# EAGLE board Panelized_Proto_cutouts_outline (EAGLE 9.1.1), part 1 of 2
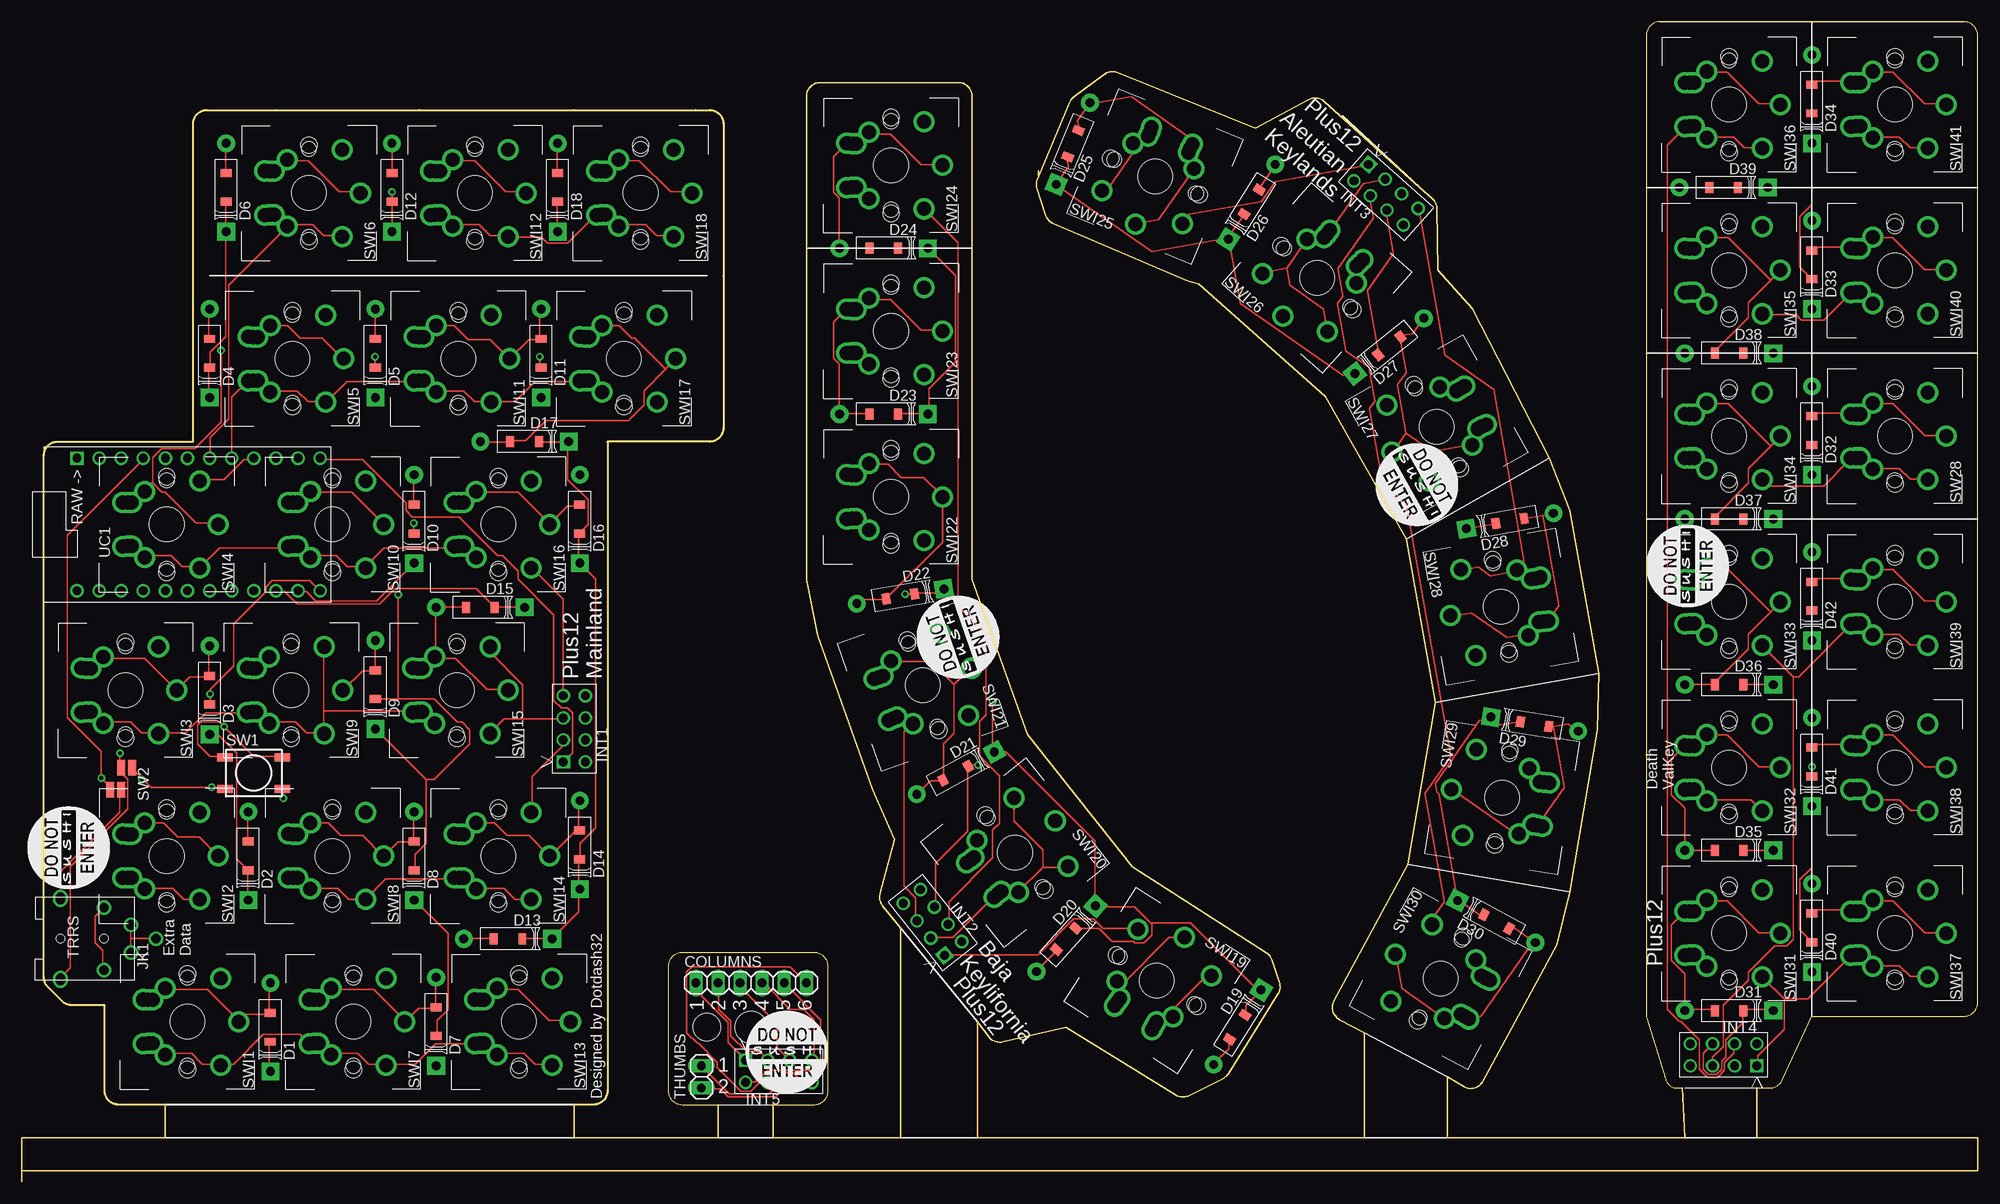
[diagram p0: board, top side]
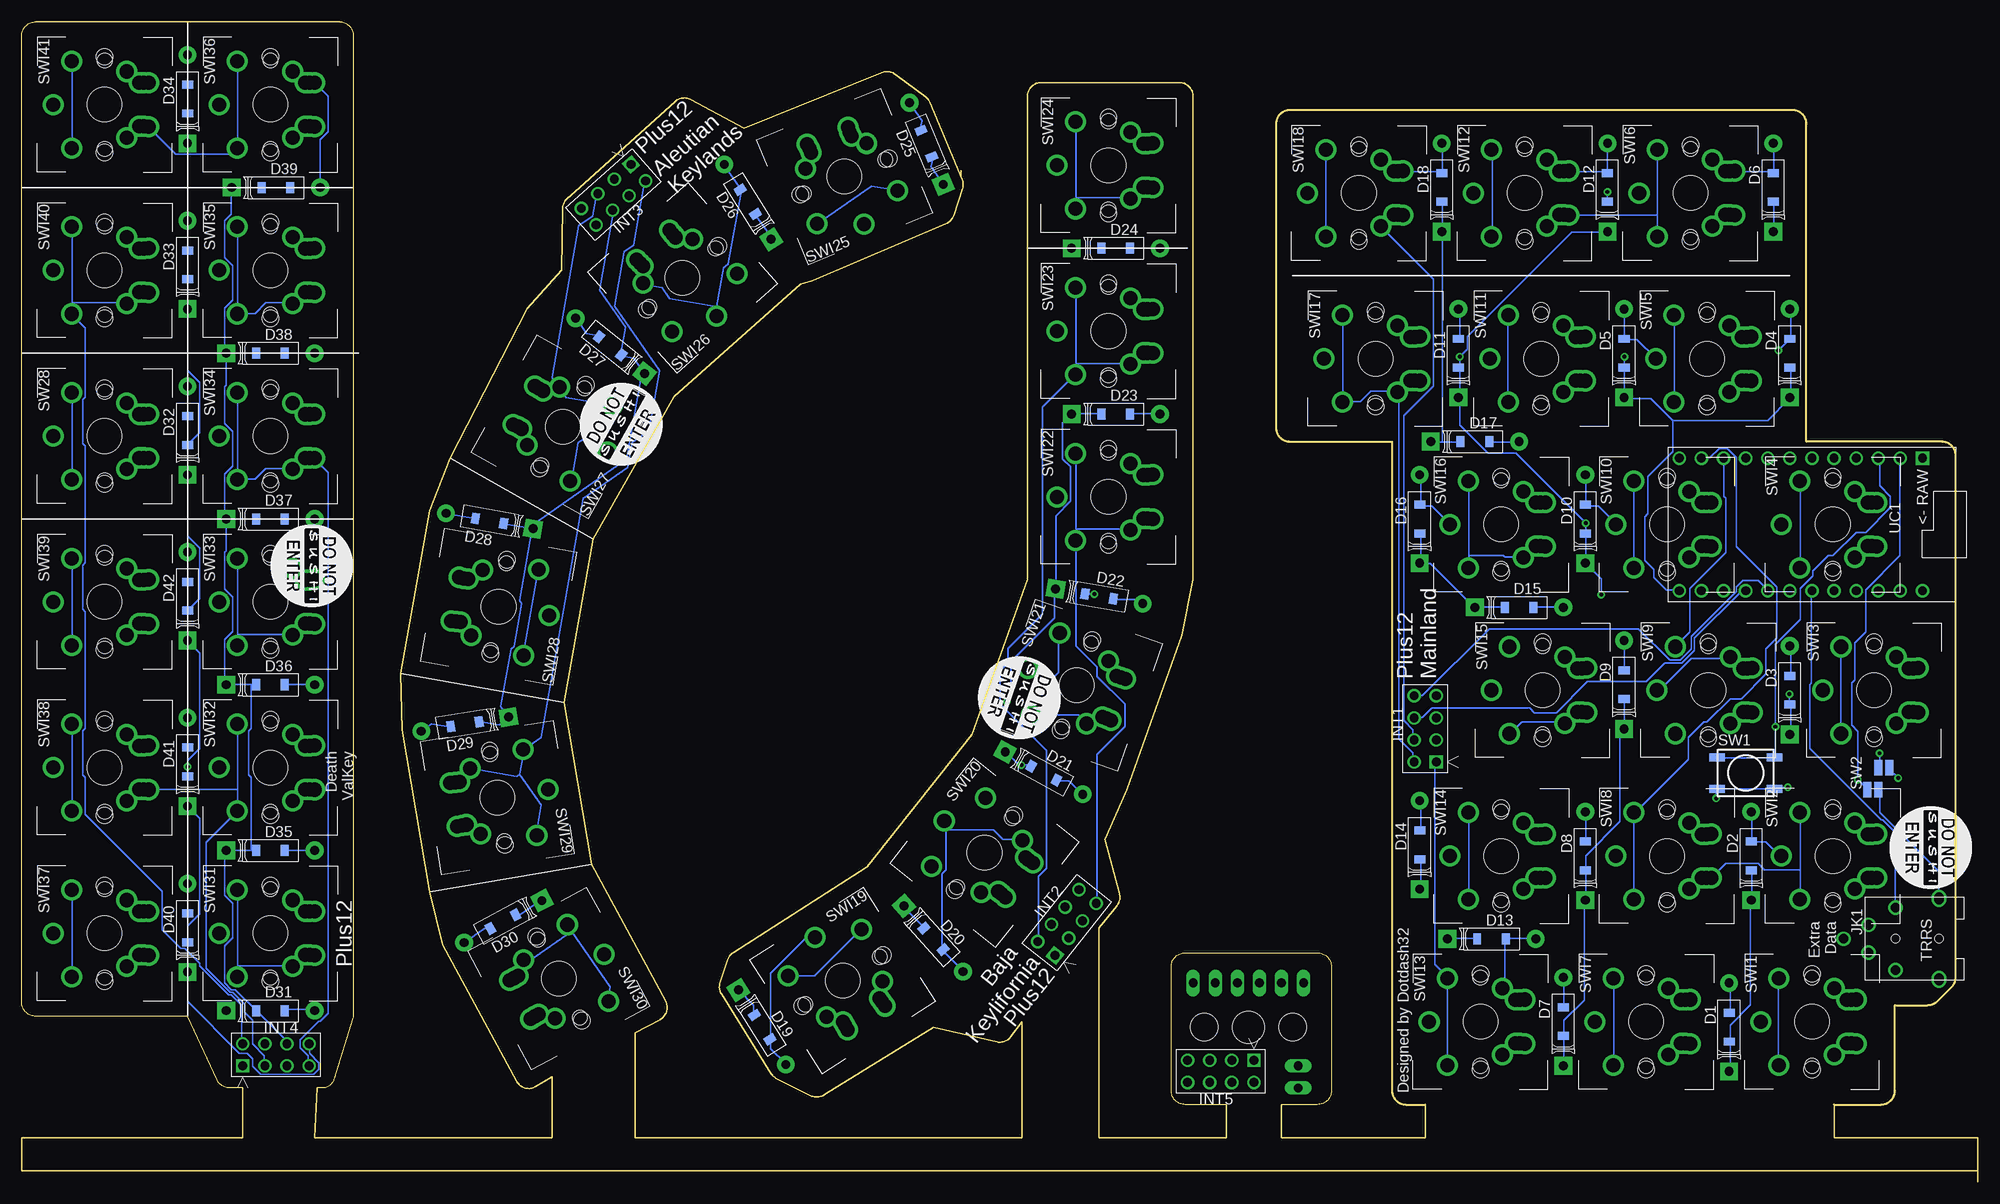
[diagram p1: board, bottom side, seen from below]

Size 224.79 x 133.35 mm. Coordinates in mm from the lower left corner, seen from the top.
Outline: 0,1.27 0,5.08 16.51,5.08 16.51,8.89 11.11,8.89 arc-90 9.53,10.48 9.53,20.32 5.74,20.32 arc-45 4.62,20.79 3,22.39 arc-45 2.54,23.52 2.54,83.5 arc-90 4.13,85.09 19.68,85.09 19.68,121.6 arc-90 21.27,123.19 29.21,123.19 63.5,123.19 79.06,123.19 arc-90 80.64,121.6 80.64,104.14 80.64,86.68 arc-90 79.06,85.09 67.31,85.09 67.31,10.48 arc-90 65.72,8.89 63.5,8.89 63.5,5.08 80.01,5.08 80.01,8.89 75.88,8.89 arc-90 74.3,10.48 74.3,24.75 arc-90 75.88,26.34 91.1,26.34 arc-90 92.69,24.75 92.69,10.48 arc-90 91.1,8.89 86.36,8.89 86.36,5.08 100.97,5.08 100.97,29.21 98.94,31.75 arc-54 98.64,33.17 100.33,39.37 97.79,45.09 91.44,62.87 90.17,69.21 90.17,124.78 arc-90 91.76,126.36 95.25,126.36 104.14,126.36 107.63,126.36 arc-90 109.22,124.78 109.22,69.21 115.57,51.44 127.64,36.2 143.04,26.34 arc-39 143.69,25.5 144.54,22.93 arc-50 144.38,21.59 138.67,12.44 arc-31 138.03,11.87 134.14,9.92 arc-58 132.6,9.99 120.02,17.78 112.73,16.1 arc-64 111.14,16.65 109.86,18.41 109.86,5.08 139.7,5.08 144.15,5.08 154.31,5.08 154.31,17.14 151.45,18.65 arc-90 150.81,20.8 159.29,36.5 162.46,55.12 159.15,73.88 149.81,90.28 135.28,103.2 133.92,103.6 118.55,110.16 arc-49 117.66,111.13 116.67,114.15 arc-41 116.72,115.26 120.4,124.06 arc-31 120.92,124.72 124.42,127.31 arc-59 125.96,127.51 141.79,121.11 147.87,124.4 arc-70 149.69,124.19 160.66,114.3 162.13,113 arc-48 162.66,111.84 162.72,104.81 166.73,100.36 175.56,83.22 177.91,77.19 181.22,58.42 181.07,51.95 177.91,33.34 176.4,27.27 167.91,11.56 arc-90 165.76,10.92 163.83,12.06 163.83,5.08 191.13,5.08 190.87,10.79 190.13,10.79 arc-73 188.88,11.92 186.76,18.82 arc-17 186.69,19.29 186.69,131.76 arc-90 188.28,133.35 200.03,133.35 219.71,133.35 223.2,133.33 arc-90 224.79,131.74 224.79,20.64 arc-90 223.2,19.05 205.74,19.05 202.36,11.72 arc-65 200.91,10.79 199.39,10.79 199.39,5.08 224.79,5.08 224.79,1.27 0,1.27
Outline: 0,1.27 0,0
Outline: 116.84,116.2 116.84,115.57
Copper layers (1*16): Top 0.035mm / dielectric 1.5mm / Bottom 0.035mm
Design rules "Sierra": minimum track width 6mil, minimum drill 0.45mm, track to track 6mil, track to pad 6mil, pad to pad 6mil, via to via 6mil, smd to smd 6mil, copper to edge 0.4mm, drill to drill 10mil, minimum pad ring 10mil, minimum via ring 8mil, stop-mask expansion 4mil, vias tented up to drill 0mil, thermal gap 10mil
Holes 3.17 mm at 78.74,17.78 88.9,17.78
Holes 3.71 mm at 83.82,17.78

## Footprints (pad centres in the part's own frame; a part is rotated, then mirrored left to right if it is on the bottom)
1X06 = drill 1.016 long: 1 -6.35,0; 2 -3.81,0; 3 -1.27,0; 4 1.27,0; 5 3.81,0; 6 6.35,0
DIODE_COMBO = smd 0.914 x 1.27 bottom: ANOSB 1.651,0; CATSB -1.651,0 | smd 0.914 x 1.27: ANOST 1.651,0; CATST -1.651,0 | drill 1.016 pad 2.032: ANOT 5.08,0 | drill 1.016 pad 2.032 square: CATT -5.08,0
INTRRIBBON = drill 1.016 square: C1 0,0 | drill 1.016: C2 2.54,0; C3 5.08,0; C4 7.62,0; C5 0,-2.54; C6 2.54,-2.54; T1 5.08,-2.54; T2 7.62,-2.54
TRRSJACK = drill 1.1: 1B 4.5,-1.9; 1T 4.8,-1.9; 2B 3.6,-6.9; 2T -3.6,-6.9; 3B -1.6,-10; 3T 1.6,-10; 4B -4.8,-1.9; 4T -4.5,-1.9; EXTRA_DATA 0,-12.87 | hole 1: 0,-1.9; 0,-6.9
FLATSWT = smd 1.778 x 0.914: P$1 -3.3,-1.8; P$2 3.3,-1.8; P$3 -3.3,1.8; P$4 3.3,1.8 | smd 1.778 x 0.914 bottom: P$5 -3.3,-1.8; P$6 3.3,-1.8; P$7 -3.3,1.8; P$8 3.3,1.8
TRANSFER_PADS = smd 1.778 x 0.914 bottom: GNDB -1.27,-1.27; IN1B -1.27,0; IN4B 1.27,0; VCCB 1.27,1.27 | smd 1.778 x 0.914: GNDT 1.27,-1.27; IN1T -1.27,0; IN4T 1.27,0; VCCT -1.27,1.27
DOUBLED_MX/ALPS = drill 1.613: LAL -2.5,4; LAR -2.5,4.5; LCL -3.81,2.54; LCR -2.54,5.08; LLP -5,-3.8; LRLP 5,-3.8; RAL 2.5,4; RAR 2.5,4.5; RCL 3.81,2.54; RCR 2.54,5.08; RLMID 0,-5.9 | hole 3.988: 0,0 | hole 1.702: -5.08,0; 5.08,0 | hole 1.9: -5.5,0; 5.5,0
1X02 = drill 1.016 long: 1 -1.27,0; 2 1.27,0
PROMICRO_UNDER = drill 1.016: P$1 -7.62,0; P$2 -7.62,-2.54; P$3 -7.62,-5.08; P$4 -7.62,-7.62; P$5 -7.62,-10.16; P$6 -7.62,-12.7; P$7 -7.62,-15.24; P$8 -7.62,-17.78; P$9 -7.62,-20.32; P$10 -7.62,-22.86; P$11 -7.62,-25.4; P$12 -7.62,-27.94; P$13 7.62,-27.94; P$14 7.62,-25.4; P$15 7.62,-22.86; P$16 7.62,-20.32; P$17 7.62,-17.78; P$18 7.62,-15.24; P$19 7.62,-12.7; P$20 7.62,-10.16; P$21 7.62,-7.62; P$22 7.62,-5.08; P$23 7.62,-2.54 | drill 1.016 square: P$24 7.62,0

## Placement (x,y rotation side)
COLUMNS  [1X06]  83.82,22.86 0 top
D1  DIODE  [DIODE_COMBO]  28.57,17.78 90 top
D2  DIODE  [DIODE_COMBO]  26.04,37.47 90 top
D3  DIODE  [DIODE_COMBO]  21.59,56.52 90 top
D4  DIODE  [DIODE_COMBO]  21.59,95.25 90 top
D5  DIODE  [DIODE_COMBO]  40.64,95.25 90 top
D6  DIODE  [DIODE_COMBO]  23.5,114.3 90 top
D7  DIODE  [DIODE_COMBO]  47.62,18.41 90 top
D8  DIODE  [DIODE_COMBO]  45.09,37.47 90 top
D9  DIODE  [DIODE_COMBO]  40.64,57.15 90 top
D10  DIODE  [DIODE_COMBO]  45.09,76.2 90 top
D11  DIODE  [DIODE_COMBO]  59.69,95.25 90 top
D12  DIODE  [DIODE_COMBO]  42.55,114.3 90 top
D13  DIODE  [DIODE_COMBO]  55.88,27.94 180 top
D14  DIODE  [DIODE_COMBO]  64.14,38.74 90 top
D15  DIODE  [DIODE_COMBO]  52.7,66.04 180 top
D16  DIODE  [DIODE_COMBO]  64.14,76.2 90 top
D17  DIODE  [DIODE_COMBO]  57.78,85.09 180 top
D18  DIODE  [DIODE_COMBO]  61.59,114.3 90 top
D19  DIODE  [DIODE_COMBO]  139.7,17.78 237.6 top
D20  DIODE  [DIODE_COMBO]  120.02,27.94 228 top
D21  DIODE  [DIODE_COMBO]  107.31,46.99 208.7 top
D22  DIODE  [DIODE_COMBO]  100.97,67.31 189.6 top
D23  DIODE  [DIODE_COMBO]  99.06,88.27 180 top
D24  DIODE  [DIODE_COMBO]  99.06,107.31 180 top
D25  DIODE  [DIODE_COMBO]  120.83,119.35 67.6 top
D26  DIODE  [DIODE_COMBO]  141.35,112.65 58 top
D27  DIODE  [DIODE_COMBO]  157.17,96.09 38.7 top
D28  DIODE  [DIODE_COMBO]  171.03,75.97 10 top
D29  DIODE  [DIODE_COMBO]  173.86,52.61 350.8 top
D30  DIODE  [DIODE_COMBO]  169.48,29.92 331.6 top
D31  DIODE  [DIODE_COMBO]  196.22,19.68 180 top
D32  DIODE  [DIODE_COMBO]  205.74,86.36 90 top
D33  DIODE  [DIODE_COMBO]  205.74,105.41 90 top
D34  DIODE  [DIODE_COMBO]  205.74,124.46 90 top
D35  DIODE  [DIODE_COMBO]  196.22,38.1 180 top
D36  DIODE  [DIODE_COMBO]  196.22,57.15 180 top
D37  DIODE  [DIODE_COMBO]  196.22,76.2 180 top
D38  DIODE  [DIODE_COMBO]  196.22,95.25 180 top
D39  DIODE  [DIODE_COMBO]  195.58,114.3 180 top
D40  DIODE  [DIODE_COMBO]  205.74,29.21 90 top
D41  DIODE  [DIODE_COMBO]  205.74,48.26 90 top
D42  DIODE  [DIODE_COMBO]  205.74,67.31 90 top
INT1  INTRCNNT4X2  [INTRRIBBON]  62.23,48.26 90 top
INT2  INTRCNNT4X2  [INTRRIBBON]  106.05,26.04 128.4 top
INT3  INTRCNNT4X2  [INTRRIBBON]  154.78,116.95 318.4 top
INT4  INTRCNNT4X2  [INTRRIBBON]  199.39,13.33 180 top
INT5  INTRCNNT4X2  [INTRRIBBON]  83.19,13.97 0 top
JK1  TRRSJACKUNDER  [TRRSJACK]  2.54,27.94 90 top
SW1  RSTSWSMD  [FLATSWT]  26.67,46.99 0 top
SW2  TRANSFERPADDY  [TRANSFER_PADS]  11.43,46.36 90 top
SW28  MX/ALPSDOUBLESIDED  [DOUBLED_MX/ALPS]  215.26,85.72 90 top
SWI1  MX/ALPSDOUBLESIDED  [DOUBLED_MX/ALPS]  19.05,18.41 90 top
SWI2  MX/ALPSDOUBLESIDED  [DOUBLED_MX/ALPS]  16.66,37.47 90 top
SWI3  MX/ALPSDOUBLESIDED  [DOUBLED_MX/ALPS]  11.91,56.52 90 top
SWI4  MX/ALPSDOUBLESIDED  [DOUBLED_MX/ALPS]  16.66,75.56 90 top
SWI5  MX/ALPSDOUBLESIDED  [DOUBLED_MX/ALPS]  31.11,94.61 90 top
SWI6  MX/ALPSDOUBLESIDED  [DOUBLED_MX/ALPS]  33.02,113.66 90 top
SWI7  MX/ALPSDOUBLESIDED  [DOUBLED_MX/ALPS]  38.1,18.41 90 top
SWI8  MX/ALPSDOUBLESIDED  [DOUBLED_MX/ALPS]  35.71,37.47 90 top
SWI9  MX/ALPSDOUBLESIDED  [DOUBLED_MX/ALPS]  30.96,56.52 90 top
SWI10  MX/ALPSDOUBLESIDED  [DOUBLED_MX/ALPS]  35.71,75.56 90 top
SWI11  MX/ALPSDOUBLESIDED  [DOUBLED_MX/ALPS]  50.16,94.61 90 top
SWI12  MX/ALPSDOUBLESIDED  [DOUBLED_MX/ALPS]  52.07,113.66 90 top
SWI13  MX/ALPSDOUBLESIDED  [DOUBLED_MX/ALPS]  57.15,18.41 90 top
SWI14  MX/ALPSDOUBLESIDED  [DOUBLED_MX/ALPS]  54.76,37.47 90 top
SWI15  MX/ALPSDOUBLESIDED  [DOUBLED_MX/ALPS]  50.01,56.52 90 top
SWI16  MX/ALPSDOUBLESIDED  [DOUBLED_MX/ALPS]  54.76,75.56 90 top
SWI17  MX/ALPSDOUBLESIDED  [DOUBLED_MX/ALPS]  69.22,94.61 90 top
SWI18  MX/ALPSDOUBLESIDED  [DOUBLED_MX/ALPS]  71.12,113.66 90 top
SWI19  MX/ALPSDOUBLESIDED  [DOUBLED_MX/ALPS]  130.45,23.14 147.6 top
SWI20  MX/ALPSDOUBLESIDED  [DOUBLED_MX/ALPS]  114.15,37.85 128.4 top
SWI21  MX/ALPSDOUBLESIDED  [DOUBLED_MX/ALPS]  103.56,57.1 109.2 top
SWI22  MX/ALPSDOUBLESIDED  [DOUBLED_MX/ALPS]  99.9,78.74 90 top
SWI23  MX/ALPSDOUBLESIDED  [DOUBLED_MX/ALPS]  99.9,97.79 90 top
SWI24  MX/ALPSDOUBLESIDED  [DOUBLED_MX/ALPS]  99.9,116.84 90 top
SWI25  MX/ALPSDOUBLESIDED  [DOUBLED_MX/ALPS]  130.24,115.56 337.6 top
SWI26  MX/ALPSDOUBLESIDED  [DOUBLED_MX/ALPS]  148.85,103.91 318.4 top
SWI27  MX/ALPSDOUBLESIDED  [DOUBLED_MX/ALPS]  162.62,86.79 299.2 top
SWI28  MX/ALPSDOUBLESIDED  [DOUBLED_MX/ALPS]  169.98,66.12 280 top
SWI29  MX/ALPSDOUBLESIDED  [DOUBLED_MX/ALPS]  170.14,44.17 260.8 top
SWI30  MX/ALPSDOUBLESIDED  [DOUBLED_MX/ALPS]  163.05,23.37 241.6 top
SWI31  MX/ALPSDOUBLESIDED  [DOUBLED_MX/ALPS]  196.22,28.57 90 top
SWI32  MX/ALPSDOUBLESIDED  [DOUBLED_MX/ALPS]  196.22,47.62 90 top
SWI33  MX/ALPSDOUBLESIDED  [DOUBLED_MX/ALPS]  196.22,66.67 90 top
SWI34  MX/ALPSDOUBLESIDED  [DOUBLED_MX/ALPS]  196.22,85.72 90 top
SWI35  MX/ALPSDOUBLESIDED  [DOUBLED_MX/ALPS]  196.22,104.77 90 top
SWI36  MX/ALPSDOUBLESIDED  [DOUBLED_MX/ALPS]  196.22,123.83 90 top
SWI37  MX/ALPSDOUBLESIDED  [DOUBLED_MX/ALPS]  215.26,28.57 90 top
SWI38  MX/ALPSDOUBLESIDED  [DOUBLED_MX/ALPS]  215.26,47.62 90 top
SWI39  MX/ALPSDOUBLESIDED  [DOUBLED_MX/ALPS]  215.26,66.67 90 top
SWI40  MX/ALPSDOUBLESIDED  [DOUBLED_MX/ALPS]  215.26,104.77 90 top
SWI41  MX/ALPSDOUBLESIDED  [DOUBLED_MX/ALPS]  215.26,123.83 90 top
THUMBS  [1X02]  78.11,12.06 90 top
U$1  [3_8INCH_BOT]  10.16,33.66 90 top
U$2  [3_8INCH_TOP]  10.16,33.66 90 top
U$3  [3_8INCH_TOP]  113.67,59.69 109.2 top
U$4  [3_8INCH_BOT]  116.2,52.71 109.2 top
U$5  [3_8INCH_TOP]  153.85,81.97 299.2 top
U$6  [3_8INCH_BOT]  149.4,88.92 299.2 top
U$7  [3_8INCH_BOT]  196.22,66.04 90 top
U$8  [3_8INCH_TOP]  196.22,66.04 90 top
U$9  [3_8INCH_TOP]  83.19,10.16 0 top
UC1  PROMICROUNDER  [PROMICRO_UNDER]  6.35,75.56 90 top

## Library data of the parts
COLUMNS THUMBS = pinhead
D1-D42 INT1-INT5 JK1 SW1 SW2 SW28 SWI1-SWI41 UC1 = Keys
U$1-U$9 = Logos

## Nets
N$1: INT1.C5 SWI5.LAL SWI5.LAR SWI5.LCL SWI5.LCR SWI5.LLP SWI5.LRLP SWI11.LAL SWI11.LAR SWI11.LCL SWI11.LCR SWI11.LLP SWI11.LRLP SWI17.LAL SWI17.LAR SWI17.LCL SWI17.LCR SWI17.LLP SWI17.LRLP UC1.P$17
N$2: D1.ANOSB D1.ANOST D1.ANOT SWI1.RAL SWI1.RAR SWI1.RCL SWI1.RCR SWI1.RLMID
N$3: D2.ANOSB D2.ANOST D2.ANOT SWI2.RAL SWI2.RAR SWI2.RCL SWI2.RCR SWI2.RLMID
N$4: D3.ANOSB D3.ANOST D3.ANOT SWI3.RAL SWI3.RAR SWI3.RCL SWI3.RCR SWI3.RLMID
N$5: D4.ANOSB D4.ANOST D4.ANOT SWI4.RAL SWI4.RAR SWI4.RCL SWI4.RCR SWI4.RLMID
N$6: D5.ANOSB D5.ANOST D5.ANOT SWI5.RAL SWI5.RAR SWI5.RCL SWI5.RCR SWI5.RLMID
N$7: D6.ANOSB D6.ANOST D6.ANOT SWI6.RAL SWI6.RAR SWI6.RCL SWI6.RCR SWI6.RLMID
N$8: D7.ANOSB D7.ANOST D7.ANOT SWI7.RAL SWI7.RAR SWI7.RCL SWI7.RCR SWI7.RLMID
N$9: D8.ANOSB D8.ANOST D8.ANOT SWI8.RAL SWI8.RAR SWI8.RCL SWI8.RCR SWI8.RLMID
N$10: D9.ANOSB D9.ANOST D9.ANOT SWI9.RAL SWI9.RAR SWI9.RCL SWI9.RCR SWI9.RLMID
N$11: D10.ANOSB D10.ANOST D10.ANOT SWI10.RAL SWI10.RAR SWI10.RCL SWI10.RCR SWI10.RLMID
N$12: D11.ANOSB D11.ANOST D11.ANOT SWI11.RAL SWI11.RAR SWI11.RCL SWI11.RCR SWI11.RLMID
N$13: D12.ANOSB D12.ANOST D12.ANOT SWI12.RAL SWI12.RAR SWI12.RCL SWI12.RCR SWI12.RLMID
N$14: D13.ANOSB D13.ANOST D13.ANOT SWI13.RAL SWI13.RAR SWI13.RCL SWI13.RCR SWI13.RLMID
N$15: D14.ANOSB D14.ANOST D14.ANOT SWI14.RAL SWI14.RAR SWI14.RCL SWI14.RCR SWI14.RLMID
N$16: D15.ANOSB D15.ANOST D15.ANOT SWI15.RAL SWI15.RAR SWI15.RCL SWI15.RCR SWI15.RLMID
N$17: D16.ANOSB D16.ANOST D16.ANOT SWI16.RAL SWI16.RAR SWI16.RCL SWI16.RCR SWI16.RLMID
N$18: D17.ANOSB D17.ANOST D17.ANOT SWI17.RAL SWI17.RAR SWI17.RCL SWI17.RCR SWI17.RLMID
N$19: D18.ANOSB D18.ANOST D18.ANOT SWI18.RAL SWI18.RAR SWI18.RCL SWI18.RCR SWI18.RLMID
N$20: D1.CATSB D1.CATST D1.CATT D2.CATSB D2.CATST D2.CATT D3.CATSB D3.CATST D3.CATT D4.CATSB D4.CATST D4.CATT D5.CATSB D5.CATST D5.CATT D6.CATSB D6.CATST D6.CATT UC1.P$12
N$21: D7.CATSB D7.CATST D7.CATT D8.CATSB D8.CATST D8.CATT D9.CATSB D9.CATST D9.CATT D10.CATSB D10.CATST D10.CATT D11.CATSB D11.CATST D11.CATT D12.CATSB D12.CATST D12.CATT UC1.P$11
N$22: D13.CATSB D13.CATST D13.CATT D14.CATSB D14.CATST D14.CATT D15.CATSB D15.CATST D15.CATT D16.CATSB D16.CATST D16.CATT D17.CATSB D17.CATST D17.CATT D18.CATSB D18.CATST D18.CATT UC1.P$10
N$23: INT1.C1 SWI1.LAL SWI1.LAR SWI1.LCL SWI1.LCR SWI1.LLP SWI1.LRLP SWI7.LAL SWI7.LAR SWI7.LCL SWI7.LCR SWI7.LLP SWI7.LRLP SWI13.LAL SWI13.LAR SWI13.LCL SWI13.LCR SWI13.LLP SWI13.LRLP UC1.P$13
N$24: INT1.C2 SWI2.LAL SWI2.LAR SWI2.LCL SWI2.LCR SWI2.LLP SWI2.LRLP SWI8.LAL SWI8.LAR SWI8.LCL SWI8.LCR SWI8.LLP SWI8.LRLP SWI14.LAL SWI14.LAR SWI14.LCL SWI14.LCR SWI14.LLP SWI14.LRLP UC1.P$14
N$25: INT1.C3 SWI3.LAL SWI3.LAR SWI3.LCL SWI3.LCR SWI3.LLP SWI3.LRLP SWI9.LAL SWI9.LAR SWI9.LCL SWI9.LCR SWI9.LLP SWI9.LRLP SWI15.LAL SWI15.LAR SWI15.LCL SWI15.LCR SWI15.LLP SWI15.LRLP UC1.P$15
N$26: INT1.C4 SWI4.LAL SWI4.LAR SWI4.LCL SWI4.LCR SWI4.LLP SWI4.LRLP SWI10.LAL SWI10.LAR SWI10.LCL SWI10.LCR SWI10.LLP SWI10.LRLP SWI16.LAL SWI16.LAR SWI16.LCL SWI16.LCR SWI16.LLP SWI16.LRLP UC1.P$16
N$27: INT1.C6 SWI6.LAL SWI6.LAR SWI6.LCL SWI6.LCR SWI6.LLP SWI6.LRLP SWI12.LAL SWI12.LAR SWI12.LCL SWI12.LCR SWI12.LLP SWI12.LRLP SWI18.LAL SWI18.LAR SWI18.LCL SWI18.LCR SWI18.LLP SWI18.LRLP UC1.P$18
N$28: SW2.VCCB SW2.VCCT UC1.P$21
N$29: INT1.T1 UC1.P$9
N$30: JK1.4B JK1.4T SW2.IN4B SW2.IN4T
N$31: JK1.1B JK1.1T SW2.IN1B SW2.IN1T
N$32: JK1.2B JK1.2T UC1.P$6
N$33: INT1.T2 UC1.P$8
N$34: SW1.P$3 SW1.P$4 SW1.P$7 SW1.P$8 UC1.P$22
N$35: SW1.P$1 SW1.P$2 SW1.P$5 SW1.P$6 SW2.GNDB SW2.GNDT UC1.P$23
N$36: JK1.3B JK1.3T JK1.EXTRA_DATA
N$37: D19.ANOSB D19.ANOST D19.ANOT SWI19.RAL SWI19.RAR SWI19.RCL SWI19.RCR SWI19.RLMID
N$38: D20.ANOSB D20.ANOST D20.ANOT SWI20.RAL SWI20.RAR SWI20.RCL SWI20.RCR SWI20.RLMID
N$39: D21.ANOSB D21.ANOST D21.ANOT SWI21.RAL SWI21.RAR SWI21.RCL SWI21.RCR SWI21.RLMID
N$40: D22.ANOSB D22.ANOST D22.ANOT SWI22.RAL SWI22.RAR SWI22.RCL SWI22.RCR SWI22.RLMID
N$41: D23.ANOSB D23.ANOST D23.ANOT SWI23.RAL SWI23.RAR SWI23.RCL SWI23.RCR SWI23.RLMID
N$42: D24.ANOSB D24.ANOST D24.ANOT SWI24.RAL SWI24.RAR SWI24.RCL SWI24.RCR SWI24.RLMID
N$43: INT2.C1 SWI19.LAL SWI19.LAR SWI19.LCL SWI19.LCR SWI19.LLP SWI19.LRLP
N$44: INT2.C2 SWI20.LAL SWI20.LAR SWI20.LCL SWI20.LCR SWI20.LLP SWI20.LRLP
N$45: INT2.C3 SWI21.LAL SWI21.LAR SWI21.LCL SWI21.LCR SWI21.LLP SWI21.LRLP
N$46: INT2.C4 SWI22.LAL SWI22.LAR SWI22.LCL SWI22.LCR SWI22.LLP SWI22.LRLP
N$47: INT2.C5 SWI23.LAL SWI23.LAR SWI23.LCL SWI23.LCR SWI23.LLP SWI23.LRLP
N$48: INT2.C6 SWI24.LAL SWI24.LAR SWI24.LCL SWI24.LCR SWI24.LLP SWI24.LRLP
N$49: D19.CATSB D19.CATST D19.CATT D20.CATSB D20.CATST D20.CATT D21.CATSB D21.CATST D21.CATT D22.CATSB D22.CATST D22.CATT D23.CATSB D23.CATST D23.CATT D24.CATSB D24.CATST D24.CATT INT2.T1
N$50: D25.ANOSB D25.ANOST D25.ANOT SWI25.RAL SWI25.RAR SWI25.RCL SWI25.RCR SWI25.RLMID
N$51: D26.ANOSB D26.ANOST D26.ANOT SWI26.RAL SWI26.RAR SWI26.RCL SWI26.RCR SWI26.RLMID
N$52: D27.ANOSB D27.ANOST D27.ANOT SWI27.RAL SWI27.RAR SWI27.RCL SWI27.RCR SWI27.RLMID
N$53: D28.ANOSB D28.ANOST D28.ANOT SWI28.RAL SWI28.RAR SWI28.RCL SWI28.RCR SWI28.RLMID
N$54: D29.ANOSB D29.ANOST D29.ANOT SWI29.RAL SWI29.RAR SWI29.RCL SWI29.RCR SWI29.RLMID
N$55: D30.ANOSB D30.ANOST D30.ANOT SWI30.RAL SWI30.RAR SWI30.RCL SWI30.RCR SWI30.RLMID
N$56: INT3.C1 SWI25.LAL SWI25.LAR SWI25.LCL SWI25.LCR SWI25.LLP SWI25.LRLP
N$57: INT3.C2 SWI26.LAL SWI26.LAR SWI26.LCL SWI26.LCR SWI26.LLP SWI26.LRLP
N$58: INT3.C3 SWI27.LAL SWI27.LAR SWI27.LCL SWI27.LCR SWI27.LLP SWI27.LRLP
N$59: INT3.C4 SWI28.LAL SWI28.LAR SWI28.LCL SWI28.LCR SWI28.LLP SWI28.LRLP
N$60: INT3.C5 SWI29.LAL SWI29.LAR SWI29.LCL SWI29.LCR SWI29.LLP SWI29.LRLP
N$61: INT3.C6 SWI30.LAL SWI30.LAR SWI30.LCL SWI30.LCR SWI30.LLP SWI30.LRLP
N$62: D25.CATSB D25.CATST D25.CATT D26.CATSB D26.CATST D26.CATT D27.CATSB D27.CATST D27.CATT D28.CATSB D28.CATST D28.CATT D29.CATSB D29.CATST D29.CATT D30.CATSB D30.CATST D30.CATT INT3.T1
N$63: D31.ANOSB D31.ANOST D31.ANOT SWI31.RAL SWI31.RAR SWI31.RCL SWI31.RCR SWI31.RLMID
N$64: D35.ANOSB D35.ANOST D35.ANOT SWI32.RAL SWI32.RAR SWI32.RCL SWI32.RCR SWI32.RLMID
N$65: D36.ANOSB D36.ANOST D36.ANOT SWI33.RAL SWI33.RAR SWI33.RCL SWI33.RCR SWI33.RLMID
N$66: D37.ANOSB D37.ANOST D37.ANOT SWI34.RAL SWI34.RAR SWI34.RCL SWI34.RCR SWI34.RLMID
N$67: D38.ANOSB D38.ANOST D38.ANOT SWI35.RAL SWI35.RAR SWI35.RCL SWI35.RCR SWI35.RLMID
N$68: D39.ANOSB D39.ANOST D39.ANOT SWI36.RAL SWI36.RAR SWI36.RCL SWI36.RCR SWI36.RLMID
N$69: D40.ANOSB D40.ANOST D40.ANOT SWI37.RAL SWI37.RAR SWI37.RCL SWI37.RCR SWI37.RLMID
N$70: D41.ANOSB D41.ANOST D41.ANOT SWI38.RAL SWI38.RAR SWI38.RCL SWI38.RCR SWI38.RLMID
N$71: D42.ANOSB D42.ANOST D42.ANOT SWI39.RAL SWI39.RAR SWI39.RCL SWI39.RCR SWI39.RLMID
N$72: D32.ANOSB D32.ANOST D32.ANOT SW28.RAL SW28.RAR SW28.RCL SW28.RCR SW28.RLMID
N$73: D33.ANOSB D33.ANOST D33.ANOT SWI40.RAL SWI40.RAR SWI40.RCL SWI40.RCR SWI40.RLMID
N$74: D34.ANOSB D34.ANOST D34.ANOT SWI41.RAL SWI41.RAR SWI41.RCL SWI41.RCR SWI41.RLMID
N$75: D32.CATSB D32.CATST D32.CATT D33.CATSB D33.CATST D33.CATT D34.CATSB D34.CATST D34.CATT D40.CATSB D40.CATST D40.CATT D41.CATSB D41.CATST D41.CATT D42.CATSB D42.CATST D42.CATT INT4.T2
N$76: INT4.C1 SWI31.LAL SWI31.LAR SWI31.LCL SWI31.LCR SWI31.LLP SWI31.LRLP SWI37.LAL SWI37.LAR SWI37.LCL SWI37.LCR SWI37.LLP SWI37.LRLP
N$77: INT4.C2 SWI32.LAL SWI32.LAR SWI32.LCL SWI32.LCR SWI32.LLP SWI32.LRLP SWI38.LAL SWI38.LAR SWI38.LCL SWI38.LCR SWI38.LLP SWI38.LRLP
N$78: INT4.C3 SWI33.LAL SWI33.LAR SWI33.LCL SWI33.LCR SWI33.LLP SWI33.LRLP SWI39.LAL SWI39.LAR SWI39.LCL SWI39.LCR SWI39.LLP SWI39.LRLP
N$79: INT4.C4 SW28.LAL SW28.LAR SW28.LCL SW28.LCR SW28.LLP SW28.LRLP SWI34.LAL SWI34.LAR SWI34.LCL SWI34.LCR SWI34.LLP SWI34.LRLP
N$80: INT4.C5 SWI35.LAL SWI35.LAR SWI35.LCL SWI35.LCR SWI35.LLP SWI35.LRLP SWI40.LAL SWI40.LAR SWI40.LCL SWI40.LCR SWI40.LLP SWI40.LRLP
N$81: INT4.C6 SWI36.LAL SWI36.LAR SWI36.LCL SWI36.LCR SWI36.LLP SWI36.LRLP SWI41.LAL SWI41.LAR SWI41.LCL SWI41.LCR SWI41.LLP SWI41.LRLP
N$82: D31.CATSB D31.CATST D31.CATT D35.CATSB D35.CATST D35.CATT D36.CATSB D36.CATST D36.CATT D37.CATSB D37.CATST D37.CATT D38.CATSB D38.CATST D38.CATT D39.CATSB D39.CATST D39.CATT INT4.T1
N$83: COLUMNS.1 INT5.C1
N$84: COLUMNS.2 INT5.C2
N$85: COLUMNS.3 INT5.C3
N$86: COLUMNS.4 INT5.C4
N$87: COLUMNS.5 INT5.C5
N$88: COLUMNS.6 INT5.C6
N$89: INT5.T1 THUMBS.1
N$90: INT5.T2 THUMBS.2